# Altium PCB PCB1.PcbDoc
Units mm, origin at the board's own origin, x right, y up, seen from the top; angles counter-clockwise.
Board outline 17.02 x 22.48 mm, 2 copper layers (Top Layer, Bottom Layer); 9 components, 5 nets, 15 pads, 0 vias.
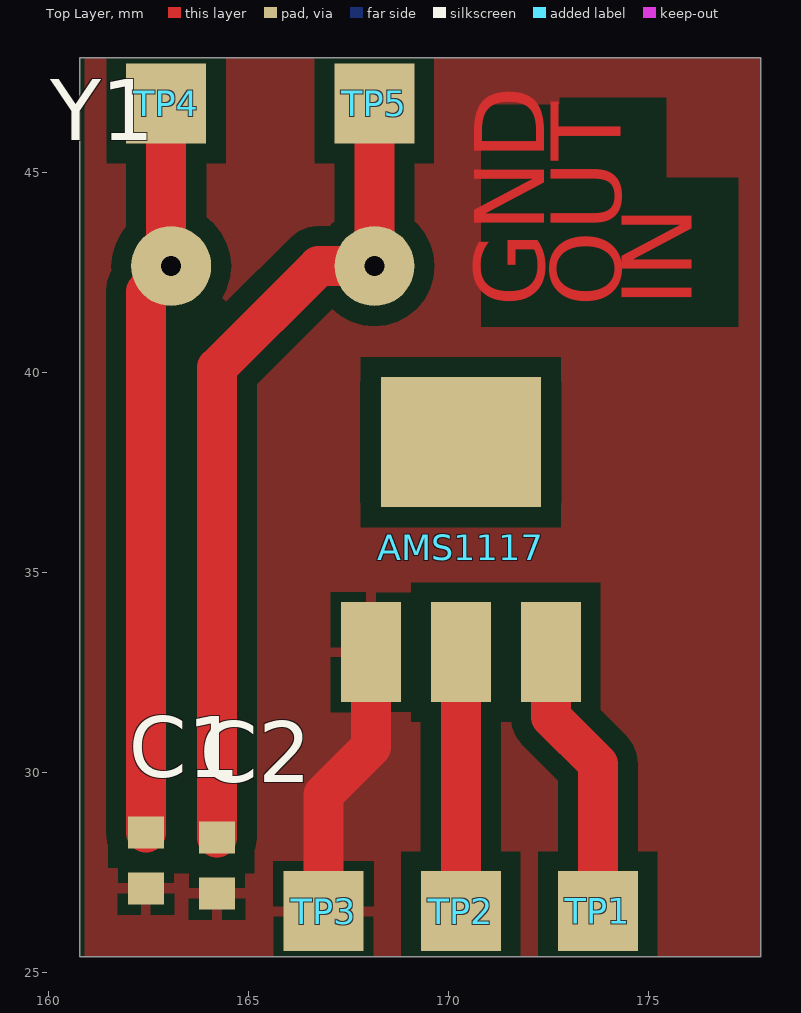
[diagram p0: Top Layer view]
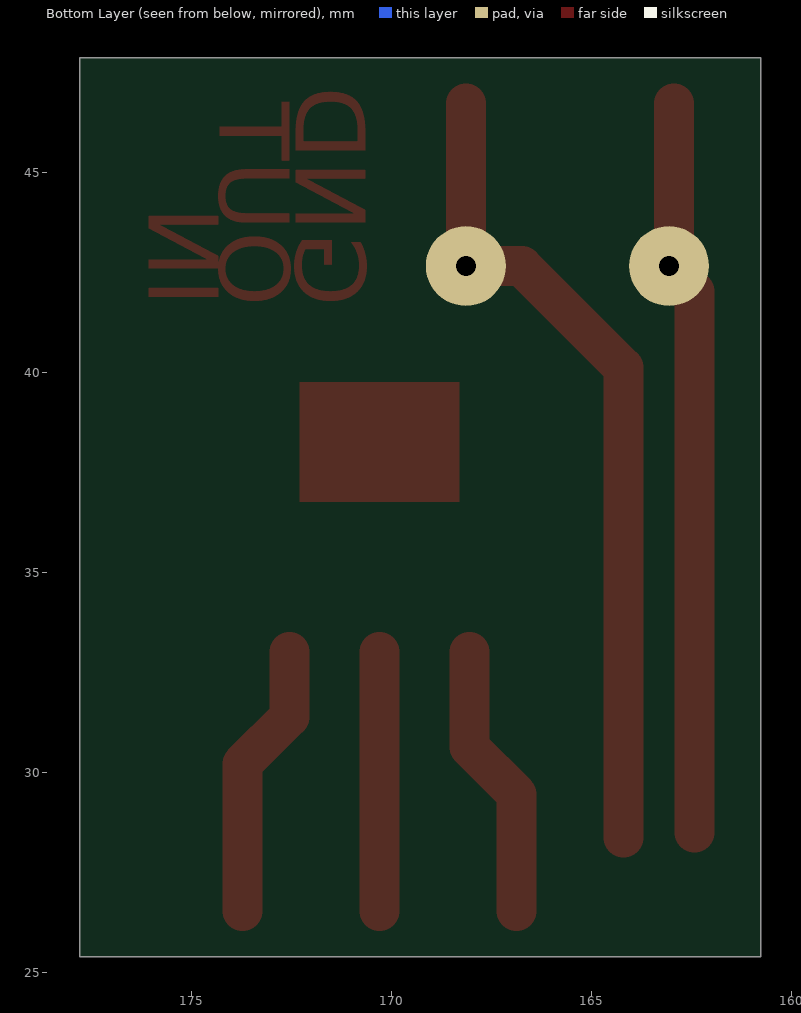
[diagram p1: Bottom Layer view, seen from below]
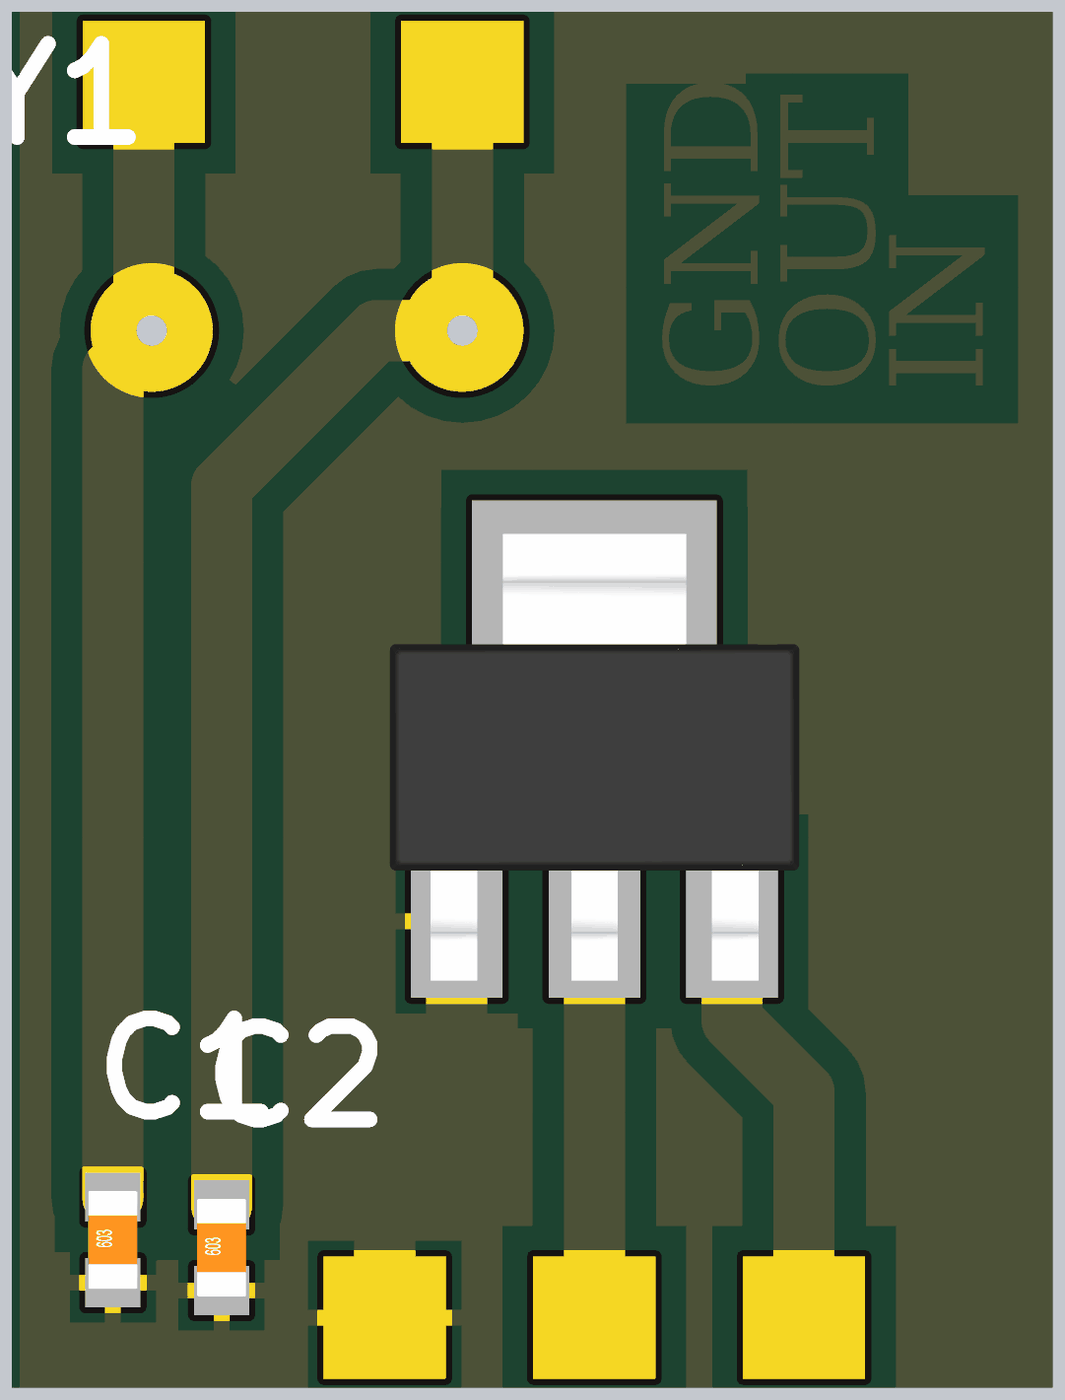
[diagram p2: 3D render of the assembled board from above, using the file's embedded part models]

## Layer stack, top to bottom
Top Solder: solder mask 0.0102, Solder Resist, Dk 3.5
Top Layer: signal copper 0.0356
Dielectric 1: dielectric 0.32, FR-4, Dk 4.8
Bottom Layer: signal copper 0.0356
Bottom Solder: solder mask 0.0102, Solder Resist, Dk 3.5

## Board outline
160.782,25.4 177.8,25.4 177.8,47.879 160.782,47.879

## Design rules (kind name [scope] priority, off if disabled: settings)
Clearance Clearance_1 [InPolygon] p1: gap=0.5 ignorepadtopadclearanceinfootprint=FALSE
Clearance [All] p2: gap=0.254 ignorepadtopadclearanceinfootprint=FALSE except(0: Arc-Hole Track-Hole SMDPad-Hole THPad-Hole Via-Hole Fill-Hole Poly-Hole Region-Hole Text-Hole)
PolygonConnect [All] p1: connectstyle=Relief reliefconductorwidth=0.254 reliefentries=4 polygonreliefangle="90 Angle" airgapwidth=0.254
RoutingVias [All] p1: holewidth=0.711 width=1.27 viastyle="Through Hole" minholewidth=0.711 minwidth=1.27 maxholewidth=0.711 maxwidth=1.27
SolderMaskExpansion [All] p1: expansion=0.102
Width [All] p1: maxlimit=5 minlimit=0.254 preferedwidth=0.254
30 further rules are at their usual default settings.

## Components (designator, comment, footprint, x,y, rotation, side; value= is the part's Value field where it differs from the comment)
AMS1117 "AMS1117" SOT-223-3 167.057,32.27 r0 top
C1 "100nF" "C 0603 / 1608" 162.433,27.813 r90 top
C2 "100nF" "C 0603 / 1608" 164.211,27.686 r90 top
TP1 "Test pad" TP20SQ 173.736,26.543 r90 top
TP2 "Test pad" TP20SQ 170.307,26.543 r90 top
TP3 "Test pad" TP20SQ 166.878,26.543 r90 top
TP4 "Test pad" TP20SQ 162.941,46.736 r0 top
TP5 "Test pad" TP20SQ 168.148,46.736 r0 top
Y1 "Crystals (Generic)These are passive quartz crystals, which can be used as a clock source for a microcontroller.Crystal's are two-terminal devices. They require external \"load\" capacitors to generate an oscillating signal." HC49US 165.608,42.672 r0 top

## Footprints (in the part's own frame and the unit in brackets; to place one, negate y for a bottom-side part, rotate by r counter-clockwise, add the part's x,y. Pads: shape width x height; smd on the part's side, far side on the other; paste and mask are expansions set on the pad)
"C 0603 / 1608" [mm] "Capacitor 0603 / 1608 (1.6 x 0.8 mm)"
  rect 0.8x0.9 smd: 1(-0.7,0) 2(0.7,0)
  body extent -0.8,-0.4 0.8,0.4, height 0.3
HC49US [mm]
  round 2 hole 0.5: 1(-2.54,0) 2(2.54,0)
SOT-223-3 [mm]
  rect 1.5x2.5 smd: 1(1,0.75) 2(3.25,0.75) 3(5.5,0.75)
  rect 4x3.25 smd: ""(3.25,6)
  Top Layer region: 1.25,4.5 5.25,4.5 5.25,7.5 1.25,7.5
  body extent -0.1,-0.22 6.6,7.08, height 1.8
TP20SQ [mm]
  rect 2x2 smd paste-1: TP(0,0)

## Part data
AMS1117: "LDO 3.3V/5V/12V"
C1 C2: library part Capacitor
TP1 TP2 TP3 TP4 TP5: library part TPSQTP20SQ
Y1: library part CRYSTALPTH-HC49US, Package=HC49US, DeviceName=PTH-HC49US, DeviceSetName=CRYSTAL, GateName_1=G$1, LibraryName=SparkFun-Clocks, SymbolName_1=CRYSTAL

## Nets (pads, with @x,y where several pads share a name; then routed paths per layer and width w, separated by ;. In a path a pad name is that pad's centre, name@x,y a point inside that pad or via, vN(x,y) a via of type N, cw(c..) or ccw(c..) an arc to the next point about the centre after c; other vN are vias at no path point)
NetAMS1117_1: AMS1117.1 C1.1 C2.1 TP3.TP | length 7
  Top Layer w1: TP3.TP 166.878,29.464 168.057,30.643 AMS1117.1
NetAMS1117_2: AMS1117.2 TP2.TP | length 6.5
  Top Layer w1: TP2.TP AMS1117.2
NetAMS1117_3: AMS1117.3 TP1.TP | length 7
  Top Layer w1: AMS1117.3 172.557,31.405 173.736,30.226 TP1.TP
NetC1_2: C1.2 TP4.TP Y1.1 | length 18.5
  Top Layer w1: C1.2 162.433,42.037 Y1.1 162.941,42.799 TP4.TP
NetC2_2: C2.2 TP5.TP Y1.2 | length 20.8
  Top Layer w1: C2.2 164.211,40.132 166.751,42.672 Y1.2 TP5.TP
pads on no net: AMS1117.

## Polygon pours and split planes (outlines as drawn)
NetAMS1117_1 on Top Layer "GND" (solid, pour order 0): 177.8,25.4 177.8,47.879 160.909,47.879 160.909,25.4

## Other copper
Top Layer:
  text "GND" at 172.974,41.656 h3 r90
  text "OUT" at 174.879,41.656 h3 r90
  text "IN" at 176.657,41.656 h3 r90